# Altium PCB binbot_board_up.PcbDoc
Units mm, origin at the board's own origin, x right, y up, seen from the top; angles counter-clockwise.
Board outline 68.89 x 80.83 mm, 2 copper layers (Top Layer, Bottom Layer); 9 components, 0 nets, 44 pads, 5 vias.
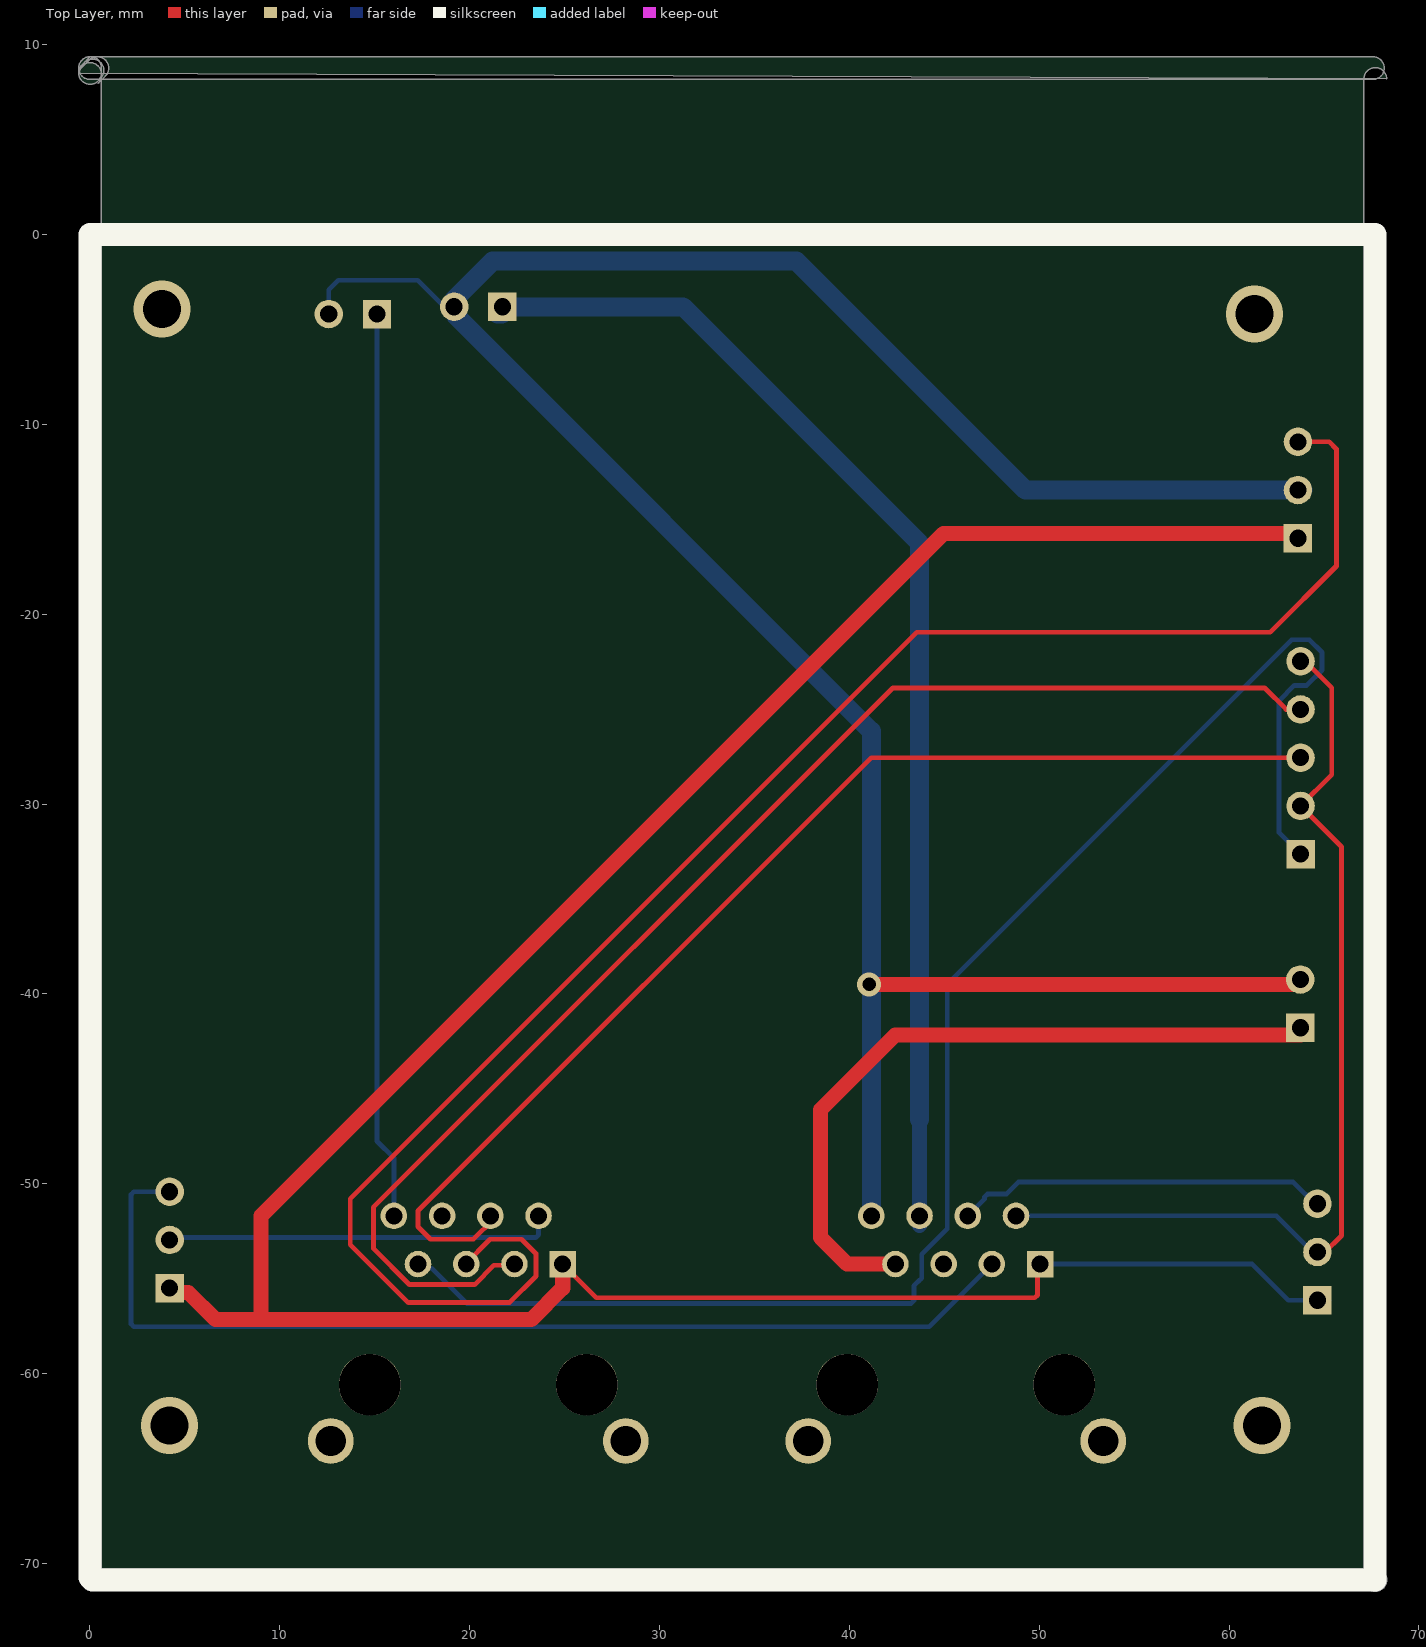
[diagram p0: Top Layer view]
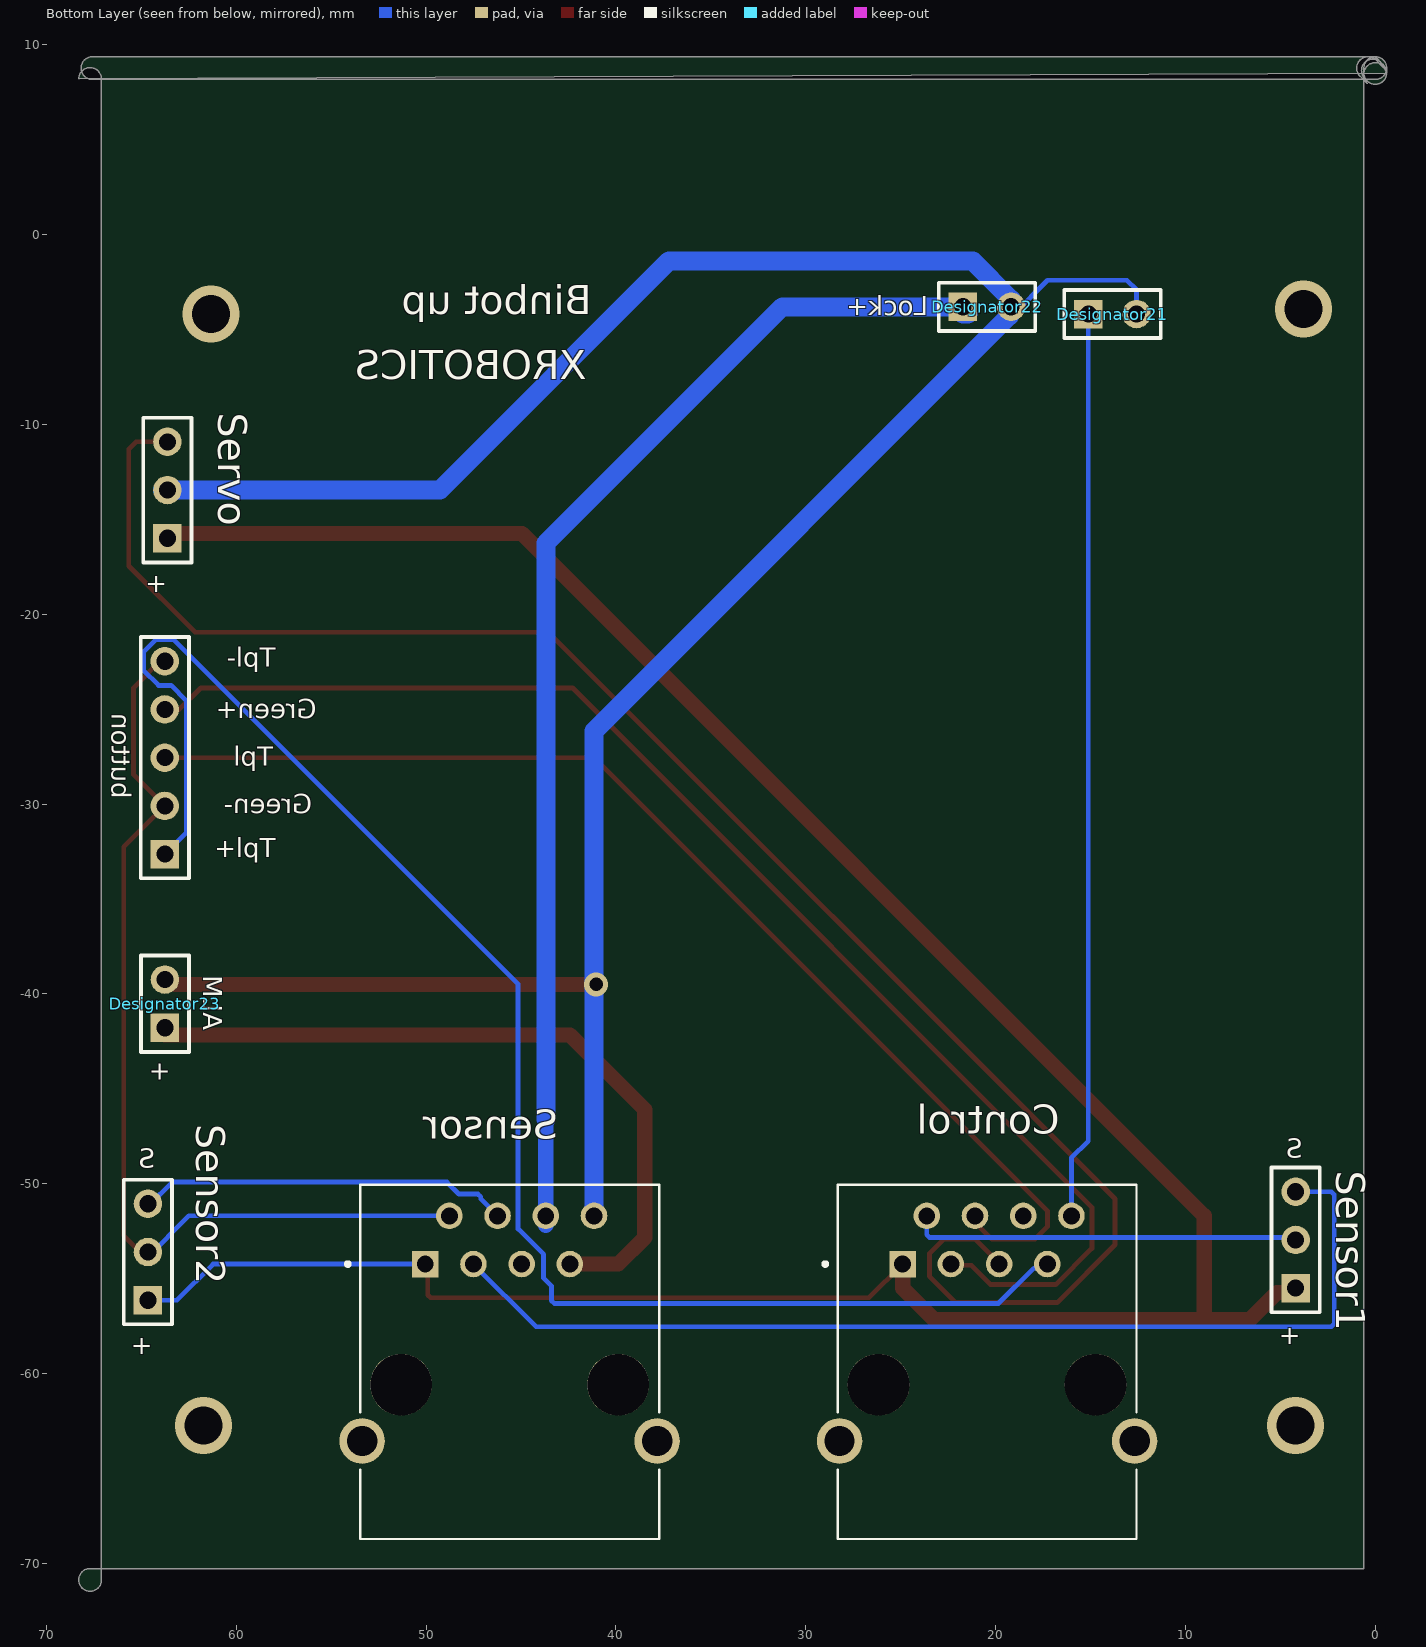
[diagram p1: Bottom Layer view, seen from below]

## Layer stack, top to bottom
Top Solder: solder mask 0.0102, Solder Resist, Dk 3.5
Top Layer: signal copper 0.0356
Dielectric 1: dielectric 0.32, FR-4, Dk 4.8
Bottom Layer: signal copper 0.0356
Bottom Solder: solder mask 0.0102, Solder Resist, Dk 3.5

## Board outline
-0.591,8.477 cw(c0.009,8.445) -0.57,8.604 cw(c0.009,8.445) -0.491,8.779 cw(c0.009,8.445) -0.223,8.999 cw(c0.009,8.445) 0.608,8.477 cw(c0.009,8.509) 0.507,8.174 0.568,8.163 cw(c0.009,8.382) 0.433,7.957 0.814,8.338 ccw(c0.39,8.763) 0.99,8.763 ccw(c0.39,8.763) 0.39,9.363 ccw(c0.39,8.763) 0.199,9.332 ccw(c0.009,8.763) 0.009,9.363 67.573,9.363 cw(c67.573,8.763) 68.173,8.763 cw(c67.573,8.763) 68.147,8.588 ccw(c67.7,8.187) 67.099,8.187 67.099,8.163 67.099,-70.266 67.099,-70.866 ccw(c67.7,-70.866) 67.7,-71.466 ccw(c67.7,-70.866) 68.3,-70.866 ccw(c67.7,-70.866) 67.7,-70.266 0.712,-70.266 0.609,-70.274 0.609,8.133 0.609,8.763 ccw(c0.009,8.763) 0.492,9.119 ccw(c0.009,8.763) 0.199,9.332 ccw(c0.39,8.763) 0.002,9.221 cw(c0.136,8.636) 0.492,9.119 cw(c0.136,8.636) 0.736,8.636 cw(c0.136,8.636) 0.635,8.303 0.594,8.248 ccw(c0.009,8.382) 0.609,8.382 0.56,8.211 0.433,8.084 cw(c0.009,8.509) -0.588,8.445 cw(c0.009,8.382) -0.561,8.572 cw(c0.009,8.382) -0.416,8.807 -0.035,9.188 0.002,9.221 ccw(c0.136,8.636) -0.289,9.061 -0.416,8.934 ccw(c0.009,8.509) -0.578,8.636 cw(c0.009,8.763) -0.592,8.763 cw(c0.009,8.763) 0.009,9.363 -0.364,8.969 -0.491,8.779 -0.592,8.763 -0.592,8.509 cw(c0.009,8.509) -0.578,8.636 -0.561,8.572 ccw(c0.009,8.763) 0.009,8.163 67.573,8.163 ccw(c67.573,8.763) 68.147,8.588 cw(c67.7,8.187) 68.3,8.187

## Design rules (kind name [scope] priority, off if disabled: settings)
Clearance [All] p1: gap=0.254 ignorepadtopadclearanceinfootprint=FALSE except(0: Arc-Hole Track-Hole SMDPad-Hole THPad-Hole Via-Hole Fill-Hole Poly-Hole Region-Hole Text-Hole)
PolygonConnect [All] p1: connectstyle=Relief reliefconductorwidth=0.254 reliefentries=4 polygonreliefangle="90 Angle" airgapwidth=0.254
RoutingVias [All] p1: holewidth=0.711 width=1.27 viastyle="Through Hole" minholewidth=0.711 minwidth=1.27 maxholewidth=0.711 maxwidth=1.27
SolderMaskExpansion [All] p1: expansion=0.102 istentingtop=FALSE
Width [All] p1: maxlimit=0.254 minlimit=0.254 preferedwidth=0.254
30 further rules are at their usual default settings.

## Components (designator, comment, footprint, x,y, rotation, side; value= is the part's Value field where it differs from the comment)
button "Comment" HDR1X5 63.763,-32.639 r90 bottom
Designator21 "Comment" HDR1X2 15.122,-4.191 r180 bottom
Designator22 "Comment" HDR1X2 21.726,-3.81 r180 bottom
Designator23 "Comment" HDR1X2 63.754,-41.783 r90 bottom
Sensor1 "Comment" HDR1X3 4.2,-55.499 r90 bottom
Sensor2 "Comment" HDR1X3 64.652,-56.134 r90 bottom
Servo "Comment" HDR1X3 63.627,-16.002 r90 bottom
? "UTP Connector" CUI_CRJ056-1-TH 20.456,-60.579 r180 bottom
? "UTP Connector" CUI_CRJ056-1-TH 45.602,-60.579 r180 bottom

## Footprints (in the part's own frame and the unit in brackets; to place one, negate y for a bottom-side part, rotate by r counter-clockwise, add the part's x,y. Pads: shape width x height; smd on the part's side, far side on the other; paste and mask are expansions set on the pad)
CUI_CRJ056-1-TH [mm]
  rect 1.398x1.398 / inner round 1.398 / far side rect 1.398x1.398 hole 0.89: 1(-4.445,6.35)
  round 1.398 hole 0.89: 2(-3.175,8.89) 3(-1.905,6.35) 4(-0.635,8.89) 5(0.635,6.35) 6(1.905,8.89) 7(3.175,6.35) 8(4.445,8.89)
  round 2.4 hole 1.6: S1(-7.77,-2.97) S2(7.77,-2.97)
  round 3.25 hole 3.25 unplated: ""(-5.715,0) ""(5.715,0)
  silkscreen extent -8.62,-8.13 7.87,10.52, body extent -7.87,-8.13 7.87,10.52, height 11.75
HDR1X2 [mm] "Connector; Header; 2 Position"
  rect 1.5x1.5 hole 0.9: 1(0,0)
  round 1.5 hole 0.9: 2(2.54,0)
  silkscreen extent -1.27,-1.27 3.81,1.27
HDR1X3 [mm] "Connector; Header; 3 Position"
  rect 1.5x1.5 hole 0.9: 1(0,0)
  round 1.5 hole 0.9: 2(2.54,0) 3(5.08,0)
  silkscreen extent -1.27,-1.27 6.35,1.27
HDR1X5 [mm] "Connector; Header; 5 Position"
  rect 1.5x1.5 hole 0.9: 1(0,0)
  round 1.5 hole 0.9: 2(2.54,0) 3(5.08,0) 4(7.62,0) 5(10.16,0)
  silkscreen extent -1.27,-1.27 11.43,1.27

## Via types
v1: diameter 3, hole 2, Top Layer to Bottom Layer, 4 vias
v2: diameter 1.27, hole 0.711, Top Layer to Bottom Layer, 1 vias

## Nets (pads, with @x,y where several pads share a name; then routed paths per layer and width w, separated by ;. In a path a pad name is that pad's centre, name@x,y a point inside that pad or via, vN(x,y) a via of type N, cw(c..) or ccw(c..) an arc to the next point about the centre after c; other vN are vias at no path point)
pads on no net: ?. ?.1 ?.2 ?.3 ?.4 ?.5 ?.6 ?.7 ?.8 ?.S1 ?.S2 button.1 button.2 button.3 button.4 button.5 Designator21.1 Designator21.2 Designator22.1 Designator22.2 Designator23.1 Designator23.2 Sensor1.1 Sensor1.2 Sensor1.3 Sensor2.1 Sensor2.2 Sensor2.3 Servo.1 Servo.2 Servo.3
copper on no net: | length 889.7
  Top Layer w0.254: 4.2,-55.499 4.42,-55.719 ; 19.759,-54.234 21.074,-52.919 22.733,-52.919 23.495,-53.681 23.495,-54.864 22.098,-56.261 16.764,-56.261 13.716,-53.213 13.716,-50.8 43.561,-20.955 62.166,-20.955 65.659,-17.462 65.659,-11.303 65.278,-10.922 63.627,-10.922 ; 19.821,-54.229 20.078,-54.229 ; 21.261,-51.859 20.202,-52.919 17.939,-52.919 17.281,-52.261 17.281,-51.432 41.153,-27.559 63.763,-27.559 ; 22.361,-54.229 22.293,-54.296 21.281,-54.296 20.268,-55.309 16.833,-55.309 14.931,-53.406 14.931,-51.242 42.284,-23.888 61.87,-23.888 63.001,-25.019 63.763,-25.019 ; 23.631,-51.689 23.885,-51.689 ; 24.901,-54.229 26.679,-56.007 45.339,-56.007 49.149,-56.007 49.762,-56.007 49.911,-55.858 49.911,-53.762 ; 64.072,-22.543 65.405,-23.876 65.405,-24.257 65.405,-28.457 63.763,-30.099 65.922,-32.258 65.922,-52.737 65.049,-53.61
  Top Layer w0.8: 4.42,-55.719 5.182,-55.719 6.613,-57.15 17.408,-57.15 23.25,-57.15 24.901,-55.499 24.901,-54.229 ; 9.017,-56.896 9.017,-51.689 44.958,-15.748 63.627,-15.748 ; v2(41.043,-39.497) 63.754,-39.497 ; 42.427,-54.229 39.878,-54.229 38.481,-52.832 38.481,-46.101 42.418,-42.164 63.754,-42.164
  Bottom Layer w0.254: 4.2,-50.419 2.317,-50.419 2.168,-50.568 2.168,-57.382 2.317,-57.531 44.205,-57.531 47.507,-54.229 ; 4.327,-52.832 23.067,-52.832 23.482,-52.832 23.631,-52.683 23.631,-51.689 ; 12.582,-4.191 12.582,-2.921 13.09,-2.413 17.272,-2.413 19.059,-4.2 ; 15.122,-4.191 15.122,-47.752 16.011,-48.641 16.011,-51.689 ; 17.281,-54.229 17.5,-54.448 17.999,-54.448 19.853,-56.302 43.253,-56.302 43.402,-56.153 43.402,-55.753 43.402,-55.383 43.666,-55.118 43.815,-54.969 43.815,-53.721 45.157,-52.379 45.157,-39.486 63.294,-21.348 64.231,-21.348 64.894,-22.011 64.894,-22.947 64.092,-23.749 63.433,-23.749 62.632,-24.551 62.632,-31.508 63.763,-32.639 ; 46.237,-51.689 47.126,-50.8 47.126,-50.695 47.275,-50.546 48.269,-50.546 48.904,-49.911 62.62,-49.911 63.382,-49.911 64.588,-51.118 ; 48.777,-51.689 62.493,-51.689 64.715,-53.912 ; 50.047,-54.229 61.223,-54.229 63.128,-56.134 64.144,-56.134 ; 63.71,-22.481 63.763,-22.481 ; 65.126,-55.511 64.503,-56.134 64.144,-56.134 ; 65.27,-56.134 64.144,-56.134
  Bottom Layer w0.8: 43.697,-52.197 43.697,-51.689 43.697,-46.609
  Bottom Layer w1: 19.177,-3.429 21.209,-1.397 37.211,-1.397 49.276,-13.462 63.881,-13.462 ; 19.186,-4.041 19.281,-4.041 19.281,-4.287 41.157,-26.162 41.157,-39.497 41.157,-51.689 ; 21.467,-4.191 21.717,-4.191 ; 21.59,-3.81 31.242,-3.81 43.697,-16.265 43.697,-46.609
  other v1: 4.2,-62.738 61.731,-62.738 61.327,-4.179 3.796,-3.925

## Silkscreen, mask and mechanical layers (free items; w line width, h text height)
Top Overlay:
  lines w1.2: 0.009,-70.739 0.009,0 67.7,0 67.7,-70.866 0.127,-70.866
Bottom Overlay:
  text "Binbot up" at 41.275,-4.191 h1.52
  text "Lock+" at 23.561,-4.249 h1
  text "XROBOTICS" at 41.529,-7.62 h1.52
  text "+" at 63.627,-18.836 h1
  text "Tpl-" at 57.912,-22.781 h1
  text "Green+" at 55.753,-25.485 h1
  text "Tpl" at 58.048,-27.988 h1
  text "Green-" at 56.007,-30.48 h1
  text "Tpl+" at 57.912,-32.814 h1
  text "ALM" at 61.744,-41.91 h1 r90
  text "+" at 63.463,-44.524 h1
  text "Control" at 16.637,-47.371 h1.52
  text "Sensor" at 43.053,-47.625 h1.52
  text "S" at 3.819,-48.641 h1
  text "S" at 64.271,-49.149 h1
  text "+" at 3.946,-58.46 h1
  text "+" at 64.398,-58.968 h1